# Altium PCB TK104_Pulsbegrenser_Eurorack.PcbDoc
Units mm, origin at the board's own origin, x right, y up, seen from the top; angles counter-clockwise.
Board outline 110 x 50 mm, 2 copper layers (Top Layer, Bottom Layer); 62 components, 48 nets, 216 pads, 292 vias.
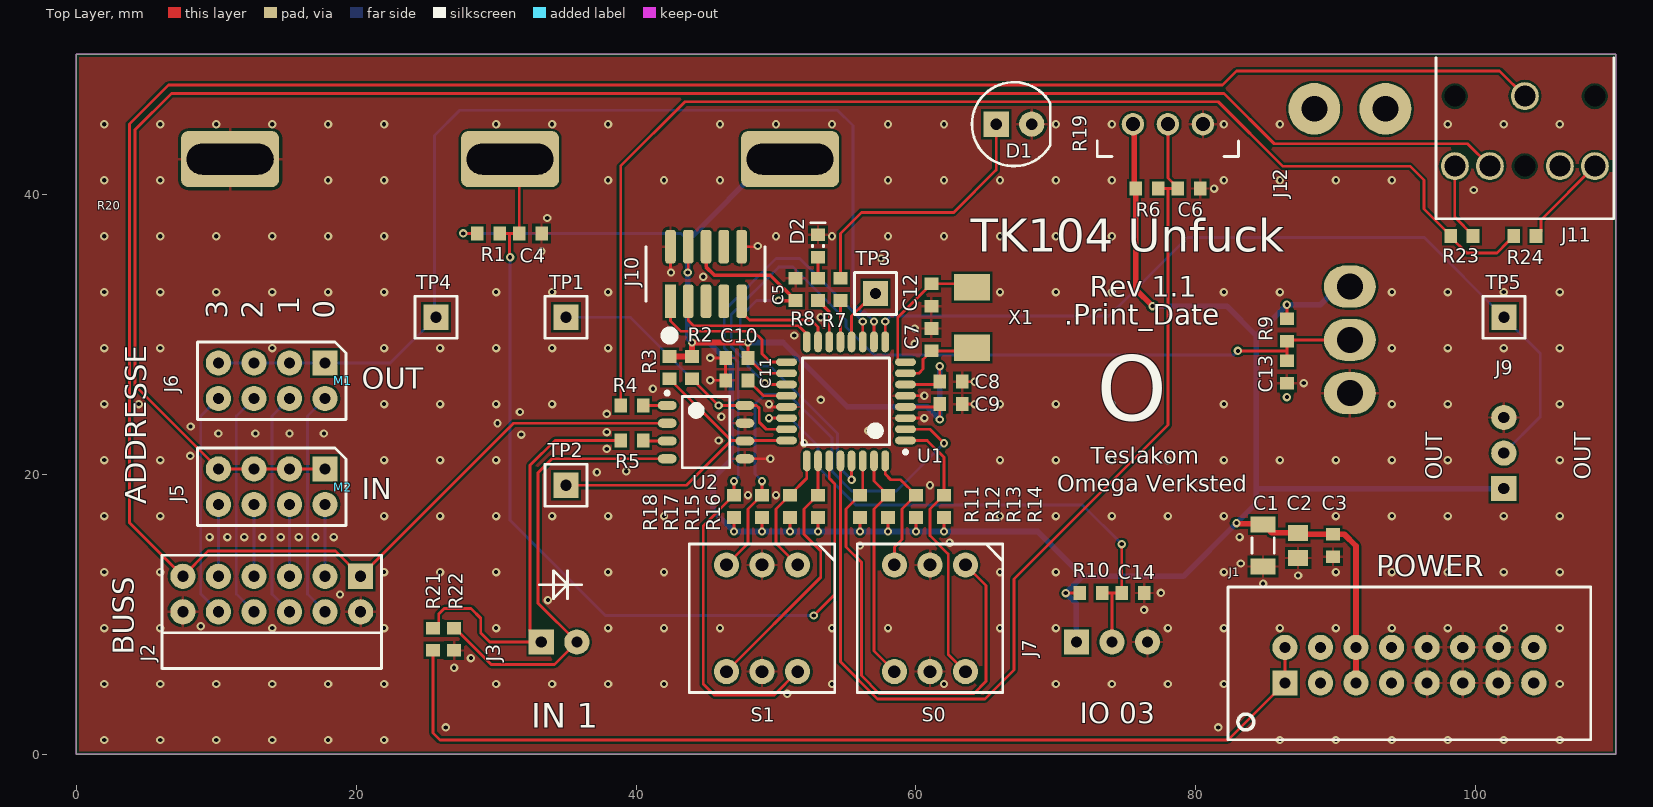
[diagram p0: Top Layer view]
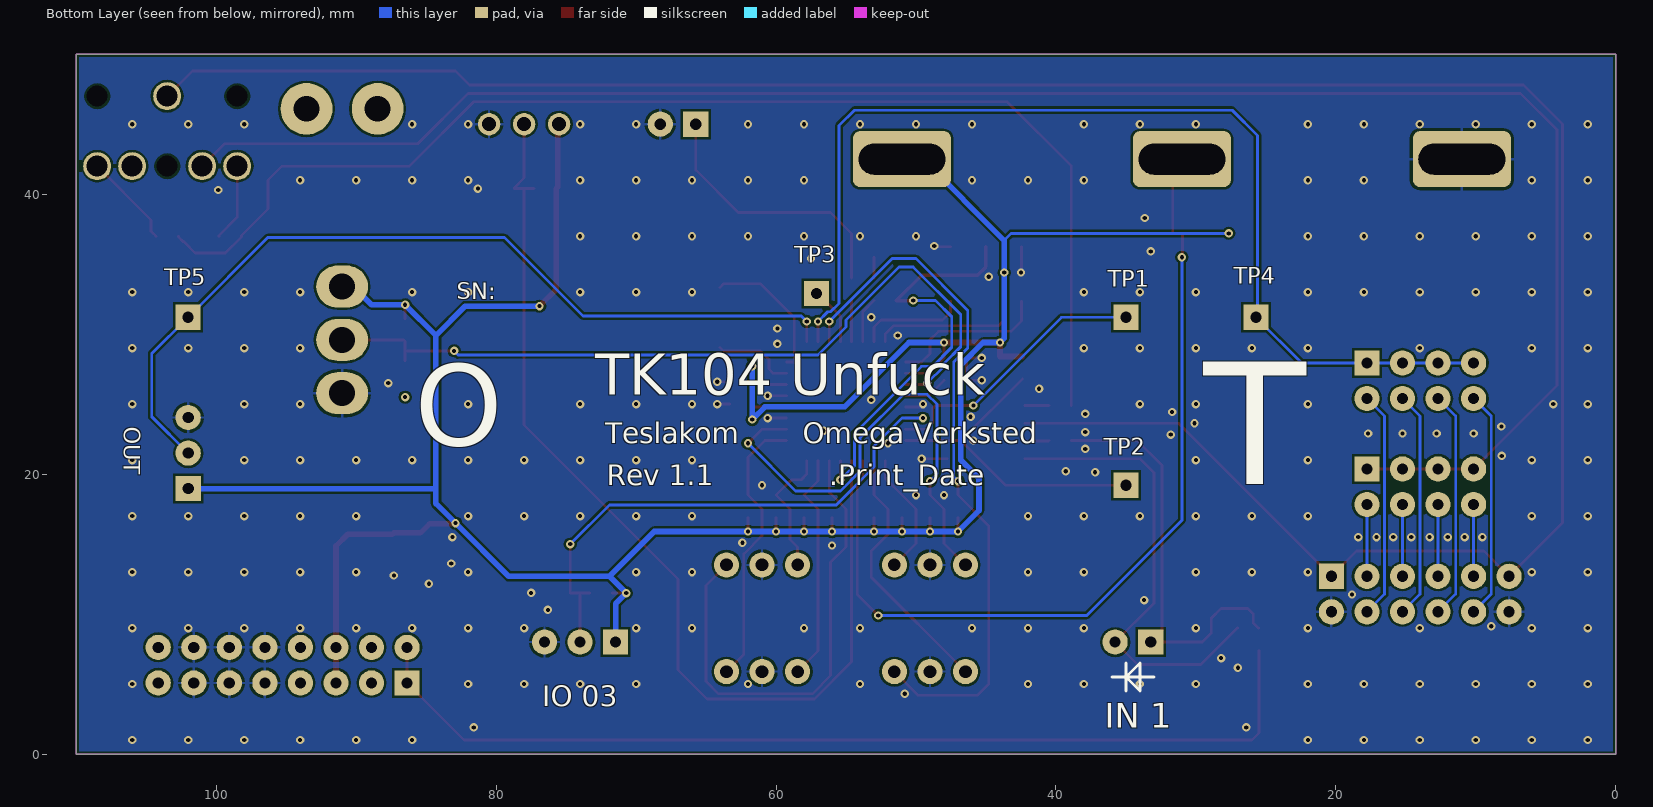
[diagram p1: Bottom Layer view, seen from below]

## Layer stack, top to bottom
Top Solder: solder mask 0.0102, Solder Resist, Dk 3.5
Top Layer: signal copper 0.0356
Dielectric 1: dielectric 0.32, FR-4, Dk 4.8
Bottom Layer: signal copper 0.0356
Bottom Solder: solder mask 0.0102, Solder Resist, Dk 3.5

## Board outline
0,0 0,50 110,50 110,0

## Design rules (kind name [scope] priority, off if disabled: settings)
Clearance [All] p1: gap=0.16 ignorepadtopadclearanceinfootprint=FALSE except(0: Arc-Text Arc-Hole Track-Text Track-Hole SMDPad-Text SMDPad-Hole THPad-Text THPad-Hole Via-Text Via-Hole Fill-Text Fill-Hole Poly-Text Poly-Hole Region-Text Region-Hole Text-Text Text-Hole)
Height [All] p1: minheight=0 maxheight=200 prefheight=12.7
HoleSize [All] p1: absolutevalues=TRUE maxlimit=6.35 minlimit=0.3 maxpercent=80.000 minpercent=20.000
MinimumSolderMaskSliver [All] p1: minsoldermaskwidth=0.1
PlaneClearance [All] p1: clearance=1
PlaneConnect [All] p1: planeconnectstyle=Relief reliefexpansion=0.508 reliefentries=4 reliefconductorwidth=1 reliefairgap=0.254
PolygonConnect PolygonConnect_1 [IsVia] p1: connectstyle=Direct reliefconductorwidth=0.254 reliefentries=4 polygonreliefangle="90 Angle" airgapwidth=0.254
PolygonConnect [All] p2: connectstyle=Relief reliefconductorwidth=0.2 reliefentries=4 polygonreliefangle="90 Angle" airgapwidth=0.2
RoutingVias [All] p1: holewidth=0.3 width=0.6 viastyle="Through Hole" minholewidth=0.3 minwidth=0.6 maxholewidth=6.35 maxwidth=10
SilkToSolderMaskClearance [IsPad] p1: minsilkscreentomaskgap=0.178 clearancetoexposedcopper=TRUE
SolderMaskExpansion [All] p1: expansion=0.1
Width [All] p1: maxlimit=10 minlimit=0.16 preferedwidth=0.4
24 further rules are at their usual default settings.

## Components (designator, comment, footprint, x,y, rotation, side; value= is the part's Value field where it differs from the comment)
C1 "4.7uF" CAPC1206(3216)170_N 84.8,14.9 r90 top
C2 "1uF" CAPC0805(2012)100_N 87.3,14.9 r90 top
C3 "100nF" CAPC0603(1608)55_N 89.8,14.9 r90 top
C4 "100nF" CAPC0603(1608)55_N 32.45,37.2 r180 top
C5 "100nF" CAPC0603(1608)55_N 51.4,33.2 r270 top
C6 "100nF" CAPC0603(1608)55_N 79.5,40.4 r180 top
C7 "8.2pF" CAPC0603(1608)55_N 61.1,29.6 r270 top
C8 "100nF" CAPC0603(1608)55_N 62.5,26.6 r0 top
C9 "100nF" CAPC0603(1608)55_N 62.5,25 r0 top
C10 "100nF" CAPC0603(1608)55_N 47.2,28.3 r0 top
C11 "100nF" CAPC0603(1608)55_N 47.2,26.7 r0 top
C12 "8.2pF" CAPC0603(1608)55_N 61.1,32.8 r90 top
C13 "100nF" CAPC0603(1608)55_N 86.5,27.3 r90 top
C14 "100nF" CAPC0603(1608)55_N 75.5,11.5 r180 top
D1 "LED Gul" LED254W7L870D500 67,45 r0 top
D2 "SMD LED Red" I_LEDC0603(1608)_N 53,36.3 r90 top
J1 "Header2x8" HDRV16W64P254_2X8_Shrouded 95.25,6.35 r90 top
J2 "Header2x6" HDRV12W64P254_2X6_RA 13.97,11.43 r270 top
J3 "JST 2pin" JST_2P 34.5,8 r270 top
J5 "Header2x4" HDRV8W64P254_2X4 13.97,19.1 r270 top
J6 "Header2x4" HDRV8W64P254_2X4 13.97,26.67 r270 top
J7 "JST 3pin" JST_3P 74,8 r270 top
J9 "JST 3pin" JST_3P 102,21.5 r0 top
J10 "Header SMD 127 2x5" SMDHDRV10P127_2X5_615X330X560B 45,34.3 r90 top
J11 "3.5mm jack" PJ-306M 103.5,47 r0 top
J12 "Slide switch" 1MS1T2B4M7RE 91,33.4 r180 top
M1 "Jumper 100mil" SNT-100-BK-T 19.05,26.67 r90 top
M2 "Jumper 100mil" SNT-100-BK-T 19.05,19.05 r90 top
R1 "10k" RESC0603(1608)_N 29.45,37.2 r180 top
R2 "4k7" RESC0603(1608)_N 44,27.6 r90 top
R3 "4k7" RESC0603(1608)_N 42.4,27.6 r90 top
R4 "330R" RESC0603(1608)_N 39.7,24.9 r0 top
R5 "330R" RESC0603(1608)_N 39.7,22.4 r0 top
R6 "10k" RESC0603(1608)_N 76.5,40.4 r180 top
R7 "330R" RESC0603(1608)_N 54.6,33.2 r270 top
R8 "330R" RESC0603(1608)_N 53,33.2 r270 top
R9 "10k" RESC0603(1608)_N 86.5,30.3 r90 top
R10 "10k" RESC0603(1608)_N 72.5,11.5 r180 top
R11 "10k" RESC0603(1608)_N 56,17.7 r270 top
R12 "10k" RESC0603(1608)_N 58,17.7 r270 top
R13 "10k" RESC0603(1608)_N 60,17.7 r270 top
R14 "10k" RESC0603(1608)_N 62,17.7 r270 top
R15 "10k" RESC0603(1608)_N 51,17.7 r270 top
R16 "10k" RESC0603(1608)_N 53,17.7 r270 top
R17 "10k" RESC0603(1608)_N 49,17.7 r270 top
R18 "10k" RESC0603(1608)_N 47,17.7 r270 top
R19 "RK09711110K" RK09711110K 78,45 r90 top
R20 "=navn" PTA4543-ANGLE 31,42.5 r270 top
R21 "0R" RESC0603(1608)_N 25.5,8.2 r90 top
R22 "0R" RESC0603(1608)_N 27,8.2 r90 top
R23 "0R" RESC0603(1608)_N 99,37 r0 top
R24 "0R" RESC0603(1608)_N 103.5,37 r0 top
S0 "MCRS3AF-16R-V-B" MCRS3AF-16R-V-B 61,9.7 r180 top
S1 "MCRS3AF-16R-V-B" MCRS3AF-16R-V-B 49,9.7 r180 top
TP1 "Header1x1" HDRV1W64P254_1X1_254X254X900B 35,31.2 r0 top
TP2 "Header1x1" HDRV1W64P254_1X1_254X254X900B 35,19.2 r0 top
TP3 "Header1x1" HDRV1W64P254_1X1_254X254X900B 57.1,32.9 r0 top
TP4 "Header1x1" HDRV1W64P254_1X1_254X254X900B 25.7,31.2 r0 top
TP5 "Header1x1" HDRV1W64P254_1X1_254X254X900B 102.013,31.2 r0 top
U1 "ATMEGA168V-10AI" TQFP80P900X900X120-32N 55,25.2 r180 top
U2 "Dual_Optocoupler" SOIC127P590X363-8N 45,23 r0 top
X1 "NX5032GA-16" CRYSTAL-ABM7 64,31.2 r90 top

## Footprints (in the part's own frame and the unit in brackets; to place one, negate y for a bottom-side part, rotate by r counter-clockwise, add the part's x,y. Pads: shape width x height; smd on the part's side, far side on the other; paste and mask are expansions set on the pad)
1MS1T2B4M7RE [mm]
  round 3.7 hole 1.85: 0(-2.54,-12.7) 0(2.54,-12.7)
  oval 3.7x3 hole 1.85: 1(0,0) 2(0,3.81) 3(0,7.62)
  body extent -3.36,-26.99 3.4,7.99, height 12.85
CAPC0603(1608)55_N [mm] "Chip Capacitor, Body 1.6x0.8mm, Height 0.55mm, IPC Medium Density"
  rect 0.9x1 smd: 1(-0.8,0) 2(0.8,0)
  body extent -0.87,-0.48 0.88,0.47, height 0.55
CAPC0805(2012)100_N [mm] "Chip Capacitor, Body 2.0x1.2mm, Height 1.0mm, IPC Medium Density"
  rect 1.15x1.45 smd: 1(-0.9,0) 2(0.9,0)
  body extent -1.1,-0.72 1.1,0.73, height 1
CAPC1206(3216)170_N [mm] "Chip Capacitor, Body 3.2x1.6mm, Height 1.7mm, IPC Medium Density"
  rect 1.15x1.8 smd: 1(-1.5,0) 2(1.5,0)
  silkscreen extent -0.55,-0.8 0.55,0.8, body extent -1.7,-0.9 1.7,0.9, height 1.7
CRYSTAL-ABM7 [mm]
  rect 1.9x2.6 smd: 1(-2.159,0) 2(2.141,0)
  body extent -3.05,-1.75 3.05,1.75, height 1.44
HDRV1W64P254_1X1_254X254X900B [mm] "Header 1x1"
  rect 1.8x1.8 hole 0.8: 1(0,0)
  silkscreen extent -1.5,-1.5 1.5,1.5
HDRV8W64P254_2X4 [mm] "Header 2x4"
  rect 1.8x1.8 hole 0.8: 1(-1.27,3.81)
  round 1.8 hole 0.8: 2(1.27,3.81) 3(-1.27,1.27) 4(1.27,1.27) 5(-1.27,-1.27) 6(1.27,-1.27) 7(-1.27,-3.81) 8(1.27,-3.81)
  silkscreen extent -2.77,-5.31 2.77,5.31, body extent -2.54,-5.08 2.54,5.08, height 8.38
HDRV12W64P254_2X6_RA [mm] "Header 2x6 Right angle"
  rect 1.8x1.8 hole 0.8: 1(-1.27,6.35)
  round 1.8 hole 0.8: 2(1.27,6.35) 3(-1.27,3.81) 4(1.27,3.81) 5(-1.27,1.27) 6(1.27,1.27) 7(-1.27,-1.27) 8(1.27,-1.27) 9(-1.27,-3.81) 10(1.27,-3.81) 11(-1.27,-6.35) 12(1.27,-6.35)
  silkscreen extent -2.77,-7.85 5.31,7.85, body extent -1.61,-7.62 11.15,7.62, height 5.59
HDRV16W64P254_2X8_Shrouded [mm] "Header 2x8 Shrouded"
  rect 1.8x1.8 hole 0.8: 1(-1.27,8.89)
  round 1.8 hole 0.8: 2(1.27,8.89) 3(-1.27,6.35) 4(1.27,6.35) 5(-1.27,3.81) 6(1.27,3.81) 7(-1.27,1.27) 8(1.27,1.27) 9(-1.27,-1.27) 10(1.27,-1.27) 11(-1.27,-3.81) 12(1.27,-3.81) 13(-1.27,-6.35) 14(1.27,-6.35) 15(-1.27,-8.89) 16(1.27,-8.89)
  silkscreen extent -5.33,-12.95 5.59,12.95, body extent -4.44,-12.07 4.83,12.06, height 8.89
I_LEDC0603(1608)_N [mm] "Chip Resistor, Body 1.6x0.8mm, IPC Medium Density"
  rect 0.9x1 smd: 1(-0.8,0) 2(0.8,0)
  silkscreen extent -0.05,-0.51 1.65,0.51, body extent -0.85,-0.45 0.85,0.45, height 0.9
JST_2P [mm]
  rect 1.8x1.8 hole 0.8: 1(0,-1.27)
  round 1.8 hole 0.8: 2(0,1.27)
  body extent -2.4,-3.7 3.35,3.7, height 7
JST_3P [mm]
  rect 1.8x1.8 hole 0.8: 1(0,-2.54)
  round 1.8 hole 0.8: 2(0,0) 3(0,2.54)
  body extent -2.35,-4.95 3.4,4.95, height 7
LED254W7L870D500 [mm] "5mm LED, 8.7mm høy, 2.54mm pitch"
  rect 1.8x1.8 hole 0.8: 1(-1.27,0)
  round 1.8 hole 0.8: 2(1.27,0)
  silkscreen extent -3,-3 2.6,3, body extent -3,-3 2.5,3, height 8.9
MCRS3AF-16R-V-B [mm] "Rotary hex encoder"
  round 1.8 hole 0.9: 1(-2.54,-3.81) 2(2.54,3.81) 4(2.54,-3.81) 8(-2.54,3.81) C(0,3.81) C(0,-3.81)
  silkscreen extent -5.2,-5.3 5.2,5.3, body extent -5,-5 5,5, height 5.01
PJ-306M [mm] "3.5mm Stereo jack"
  round 2 hole 1.5: 1(0,0) 2(5,-5) 3(2.5,-5) 4(-2.5,-5) 5(-5,-5)
  round 0 hole 1.5 unplated: ""(-5,0) ""(0,-5) ""(5,0)
  silkscreen extent -6.35,-8.75 6.35,2.75, body extent -6.1,-8.5 6.1,6.5, height 11
PTA4543-ANGLE [mm]
  rrect25% 4x7 hole 2.2 slot 6.2 at 90 deg: 1(0,20) 2(0,0) 3(0,-20)
  body extent -22.5,-31 2.5,31, height 12.6
RESC0603(1608)_N [mm] "Chip Resistor, Body 1.6x0.8mm, IPC Medium Density"
  rect 0.9x1 smd: 1(-0.8,0) 2(0.8,0)
  body extent -0.85,-0.47 0.85,0.47, height 0.6
RK09711110K [mm] "Single gang linear potmeter"
  round 1.6 hole 1: 1(0,-2.5) 2(0,0) 3(0,2.5)
  silkscreen extent -2.3,-5.05 -1.2,5.05, body extent -2.02,-4.7 25.02,4.8, height 11.35
SMDHDRV10P127_2X5_615X330X560B [mm] "SMD 2X5 Vertical Header"
  rect 2.4x0.76 smd: 1(-1.95,2.54)
  rrect50% 2.4x0.76 smd: 2(1.95,2.54) 3(-1.95,1.27) 4(1.95,1.27) 5(-1.95,0) 6(1.95,0) 7(-1.95,-1.27) 8(1.95,-1.27) 9(-1.95,-2.54) 10(1.95,-2.54)
  silkscreen extent -4.54,-4.21 1.95,4.29, body extent -2.7,-3.18 2.8,3.17, height 4.5
SNT-100-BK-T [mm] "Jumper"
  body extent -2.54,0 2.54,2.54, height 8.64
SOIC127P590X363-8N [mm] "SOIC, 8-Leads, Body 4,88x3,91mm, Pitch 1,27mm, IPC Medium Density"
  oval 1.35x0.65 smd: 1(-2.775,1.905) 2(-2.775,0.635) 3(-2.775,-0.635) 4(-2.775,-1.905) 5(2.775,-1.905) 6(2.775,-0.635) 7(2.775,0.635) 8(2.775,1.905)
  silkscreen extent -2.9,-2.55 1.7,2.9, body extent -3.1,-2.5 3.1,2.5, height 1.75
TQFP80P900X900X120-32N [mm] "TQFP, 32-Leads, Body 7,00x7,00mm, Pitch 0,80mm, IPC Medium Density"
  oval 1.5x0.55 smd mask+0.13: 1(-4.25,2.8) 2(-4.25,2) 3(-4.25,1.2) 4(-4.25,0.4) 5(-4.25,-0.4) 6(-4.25,-1.2) 7(-4.25,-2) 8(-4.25,-2.8) 17(4.25,-2.8) 18(4.25,-2) 19(4.25,-1.2) 20(4.25,-0.4) 21(4.25,0.4) 22(4.25,1.2) 23(4.25,2) 24(4.25,2.8)
  oval 0.55x1.5 smd mask+0.13: 9(-2.8,-4.25) 10(-2,-4.25) 11(-1.2,-4.25) 12(-0.4,-4.25) 13(0.4,-4.25) 14(1.2,-4.25) 15(2,-4.25) 16(2.8,-4.25) 25(2.8,4.25) 26(2,4.25) 27(1.2,4.25) 28(0.4,4.25) 29(-0.4,4.25) 30(-1.2,4.25) 31(-2,4.25) 32(-2.8,4.25)
  silkscreen extent -4.38,-3.1 3.1,3.75, body extent -4.51,-4.51 4.51,4.51, height 1.1

## Part data
C1: library part 2992, "X7R 50V", id=2992, navn=4.7uF, nokkelord="Kondensator, capacitor", pakke_opprettet="11.02.2015 13.21.22", pakke_opprettet_av=815, pakketype=1206, pris=1, produsent=Multikomp, symbol_opprettet="14.11.2014 20.19.34", symbol_opprettet_av=815
C2: library part 3582, "X7R 50V 10%", id=3582, leverandor=Farnell, leverandor_varenr=1735541, navn=1uF, nokkelord="Kondensator, capacitor", pakke_opprettet="14.11.2014 20.52.01", pakke_opprettet_av=815, pakketype=0805, pris=4, produsent=Murata, symbol_opprettet="14.11.2014 20.19.34", symbol_opprettet_av=815
C3 C4 C5 C6 C8 C9 C10 C11 C13 C14: library part 3028, "X7R 50V 5%", id=3028, leverandor=Farnell, leverandor_varenr=1759122, navn=100nF, nokkelord="Kondensator, Capacitor, CAP", pakke_opprettet_av=815, pakketype=0603, pris=1, produsent=Multikomp, symbol_opprettet_av=815
  C3 C4 C6 C13 C14: pakke_opprettet="18.02.2015 14.18.13", symbol_opprettet="14.11.2014 20.19.34"
  C5 C8 C9 C10 C11: pakke_opprettet="18.02.2015 14:18:13", symbol_opprettet="14.11.2014 20:19:34"
C7 C12: library part 3032, "NP0 50V 5%", id=3032, leverandor=Farnell, leverandor_varenr=2434642, navn=8.2pF, nokkelord="Kondensator, Capacitor, CAP", pakke_opprettet="18.02.2015 14:18:13", pakke_opprettet_av=815, pakketype=0603, pris=1, produsent=Murata, symbol_opprettet="14.11.2014 20:19:34", symbol_opprettet_av=815
D1: library part 4054, antall=500, beskrivelse="Farget/diffuse LED, 5mm", dybde=4, hylle=0, id=4054, kolonne=0, lager_type=Baklager, navn="LED Gul", nokkelord="LED, gul, yellow, 5mm, diode, lys, light,  led 5mm", pakke_opprettet="2016-02-09 18:21:00", pakke_opprettet_av=1366, pakketype=-, pris=1, produsent=-, rad=4, rom=GM, symbol_opprettet="2014-07-06 18:59:47", symbol_opprettet_av=815
D2: library part 2209, antall=50, beskrivelse=SMD, dybde=2, hylle=13, id=2209, kolonne=0, lager_type=Fremlager, leverandor=Farnell, leverandor_varenr=8554641, navn="SMD LED Red", nokkelord=SMD, pakke_opprettet="06.07.2014 18.55.44", pakke_opprettet_av=815, pakketype=0603, pris=1, produsent=Avago, rad=0, rom=OV, symbol_opprettet="06.07.2014 18.59.47", symbol_opprettet_av=815
J1: library part 4645, beskrivelse=Header, id=4645, navn="Header Shrouded 2X8P", nokkelord=Header, pakke_opprettet="2019-02-14 23:39:48", pakke_opprettet_av=815, pakketype=TH, pris=10, symbol_opprettet="2014-11-13 11:08:32", symbol_opprettet_av=815
J2: library part 4651, beskrivelse=Header, id=4651, navn="Header 2X6 Right Angle", nokkelord=Header, pakke_opprettet="2019-02-16 14:15:04", pakke_opprettet_av=815, pakketype=TH, pris=6, symbol_opprettet="2014-11-13 11:04:02", symbol_opprettet_av=815
J3: library part 2227, "pris pr. stk.", id=2227, navn="JST 2pin", nokkelord="Connector, Kontakt", pakke_opprettet="28.06.2014 18:25:03", pakke_opprettet_av=815, pakketype=TH, pris=2, symbol_opprettet="28.06.2014 15:33:17", symbol_opprettet_av=815
J5 J6: library part 4648, beskrivelse=Header, id=4648, navn="Header 2X4", nokkelord=Header, pakke_opprettet="2019-02-16 12:01:43", pakke_opprettet_av=815, pakketype=TH, pris=4, symbol_opprettet="2014-11-13 11:03:49", symbol_opprettet_av=815
J7 J9: library part 2226, "pris pr. stk.", id=2226, navn="JST 3pin", nokkelord="Connector, Kontakt", pakke_opprettet="28.06.2014 18:25:12", pakke_opprettet_av=815, pakketype=TH, pris=2, symbol_opprettet="28.06.2014 15:33:24", symbol_opprettet_av=815
J10: library part 2449, "1,27mm Pitch SMD Header", id=2449, navn="Header SMD 127 2x5", nokkelord=JTAG, pakke_opprettet="15.11.2014 18:30:38", pakke_opprettet_av=815, pakketype=SMD, pris=20, symbol_opprettet="15.11.2014 18:33:29", symbol_opprettet_av=815
J11: library part 3885, "5-pin 3.5mm 1/8\" Stereo Jack PCB Panel Mount", antall=100, beskrivelse="PCB panel mount", dybde=6, hylle=0, id=3885, kolonne=0, lager_type=Baklager, navn="3.5mm jack", pakke_opprettet="2016-11-16 18:13:13", pakke_opprettet_av=1335, pakketype=TH, pris=5, rad=0, rom=GM, symbol_opprettet="2016-11-16 18:31:54", symbol_opprettet_av=1335
J12: library part 4622, "Toggle Switch SPDT On-On", id=4622, leverandor=Farnell, leverandor_varenr=9473297, navn=1MS1T2B4M7RE, nokkelord="1M Series", pakke_opprettet="2019-02-12 23:53:13", pakke_opprettet_av=815, pakketype=TH, pris=36, produsent=Multicomp, symbol_opprettet="2017-02-20 18:08:19", symbol_opprettet_av=1335
M1 M2: library part 4649, beskrivelse="Jumper for 2.54mm pitch header", id=4649, LIBREFERENCE=Jumper, navn="Jumper 100mil", nokkelord="jumper, lask", pakke_opprettet="2019-02-16 12:16:49", pakke_opprettet_av=815, pakketype=-, pris=1, symbol_opprettet="2019-02-16 13:11:13", symbol_opprettet_av=815
R1 R6 R9 R10 R11 R12 R13 R14 R15 R16 R17 R18: library part 2444, "0.1W 1% Thick film resistor", antall=100, dybde=72, hylle=6, id=2444, kolonne=0, lager_type=Fremlager, leverandor=Farnell, leverandor_varenr=2447230, navn=10k, nokkelord="Resistor Motstand", pakke_opprettet="08.07.2014 21.15.30", pakke_opprettet_av=815, pakketype=0603, pris=0, produsent=Multikomp, rad=-1, rom=OV, symbol_opprettet="08.07.2014 21.16.33", symbol_opprettet_av=815
R2 R3: library part 3457, "0.1W 1% Thick film resistor", antall=100, dybde=64, hylle=2, id=3457, kolonne=0, lager_type=Fremlager, navn=4k7, pakke_opprettet="2014-07-08 21:15:30", pakke_opprettet_av=815, pakketype=0603, pris=0, rad=-1, rom=OV, symbol_opprettet="2014-07-08 21:16:33", symbol_opprettet_av=815
R4 R5 R7 R8: library part 2448, "0.1W 1% Thick film resistor", antall=100, dybde=36, hylle=6, id=2448, kolonne=0, lager_type=Fremlager, navn=330R, nokkelord="Resistor Motstand", pakke_opprettet="08.07.2014 21.15.30", pakke_opprettet_av=815, pakketype=0603, pris=0, rad=-1, rom=OV, symbol_opprettet="08.07.2014 21.16.33", symbol_opprettet_av=815
R19: library part 4652, "10k linear pot 1 turn", id=4652, leverandor=Farnell, leverandor_varenr=1191710, navn=RK09711110K, nokkelord="potmeter, pot", pakke_opprettet="2019-02-16 15:55:44", pakke_opprettet_av=815, pakketype=TH, pris=45, produsent=Alps, symbol_opprettet="2016-11-03 15:34:07", symbol_opprettet_av=815
R20: library part Potmeter, Farnell=1688415
R21 R22 R23 R24: library part 3186, "0.1W 1% Thick film resistor", id=3186, navn=0R, nokkelord="Resistor Motstand Jumper Lask", pakke_opprettet="2014-07-08 21:15:30", pakke_opprettet_av=815, pakketype=0603, pris=0, produsent=Multikomp, symbol_opprettet="2014-07-08 21:16:33", symbol_opprettet_av=815
S0 S1: library part 3765, "Rotary hex switch", id=3765, leverandor=Farnell, leverandor_varenr=2083018, navn=MCRS3AF-16R-V-B, nokkelord=encoder, pakke_opprettet="16.09.2016 20.12.26", pakke_opprettet_av=815, pakketype=TH, pris=13, produsent=Multikomp, symbol_opprettet="16.09.2016 20.35.40", symbol_opprettet_av=815
TP1 TP2 TP3 TP4 TP5: library part 2428, beskrivelse="2,54mm pitch", id=2428, navn="Header 1x1", pakke_opprettet="13.11.2014 12:30:32", pakke_opprettet_av=815, pakketype=TH, pris=1, symbol_opprettet="13.11.2014 10:58:46", symbol_opprettet_av=815
U1: library part 2242, antall=100, beskrivelse=Mikrokontroller, dybde=2, hylle=1, id=2242, kolonne=3, lager_type=Fremlager, navn=ATMEGA168V-10AI, pakke_opprettet="11.03.2016 13:28:05", pakke_opprettet_av=1335, pakketype=TQFP, pris=0, produsent=Atmel, rad=1, rom=OV, symbol_opprettet="11.03.2016 13:26:28", symbol_opprettet_av=1335
U2: library part 2379, "Dual Optocoupler", id=2379, leverandor=Farnell, leverandor_varenr=1086672, navn=MOCD207R2M, pakke_opprettet="23.08.2014 14:54:32", pakke_opprettet_av=774, pakketype=SOIC, pris=4, produsent=Fairchild, symbol_opprettet="28.06.2014 15:40:47", symbol_opprettet_av=815
X1: library part 1594, "Crystal 16 MHz", antall=42, dybde=1, hylle=2, id=1594, kolonne=3, lager_type=Fremlager, leverandor=DigiKey, leverandor_varenr=644-1135-1-ND, navn=NX5032GA-16, nokkelord="xtal, oscillator", pakke_opprettet="23.08.2014 20:10:40", pakke_opprettet_av=774, pakketype=SMD, pris=5, produsent=NDK, rad=0, rom=OV, symbol_opprettet="23.08.2014 20:23:20", symbol_opprettet_av=774

## Via types
v1: diameter 0.6, hole 0.3, Top Layer to Bottom Layer, tented both sides, 292 vias

## Nets (pads, with @x,y where several pads share a name; then routed paths per layer and width w, separated by ;. In a path a pad name is that pad's centre, name@x,y a point inside that pad or via, vN(x,y) a via of type N, cw(c..) or ccw(c..) an arc to the next point about the centre after c; other vN are vias at no path point)
0: J2.3 J5.2 | length 5.1
  Bottom Layer w0.2: J2.3 J5.2
1: J2.5 J5.4 | length 5.1
  Bottom Layer w0.2: J2.5 J5.4
2: J2.7 J5.6 | length 5.1
  Bottom Layer w0.2: J2.7 J5.6
3: J2.9 J5.8 | length 5.1
  Bottom Layer w0.2: J2.9 J5.8
4: J2.4 J6.2 | length 16.3
  Bottom Layer w0.2: J2.4 16.52,11.42 16.52,24.14 J6.2
5: J2.6 J6.4 | length 16.3
  Bottom Layer w0.2: J2.6 13.98,11.42 13.98,24.14 J6.4
6: J2.8 J6.6 | length 16.3
  Bottom Layer w0.2: J2.8 11.44,11.42 11.44,24.14 J6.6
7: J2.10 J6.8 | length 16.3
  Bottom Layer w0.2: J2.10 8.9,11.42 8.9,24.14 J6.8
AIN0: C4.2 R1.1 R20.2 U1.27 | length 63.8
  Top Layer w0.2: R1.1 30.95,37.2 ; v1@30.95,35.5 30.95,37.2 ; R20.2 31.65,41.85 C4.2 30.95,37.2 ; v1(52.7,9.9) 54.2,11.4 54.2,19.3 53.8,19.7 U1.27
  Bottom Layer w0.2: v1(31,35.5) 31,16.7 37.8,9.9 v1(52.7,9.9)
AIN1: C6.2 R6.1 R19.2 U1.28 | length 74
  Top Layer w0.2: U1.28 54.6,6.6 54.591,6.6 57.251,3.94 64.94,3.94 67,6 67,12.5 78,23.5 78,40.4 ; R6.1 78,40.4 ; R19.2 78,41.15 78.7,40.45 C6.2 78,40.4
AIN2: C13.2 J12.2 R9.1 U1.19 | length 57.6
  Top Layer w0.2: v1(49.2,26.5) 49.3,26.4 U1.19 ; v1(83,28.8) 86.5,28.8 ; C13.2 86.5,28.8 ; J12.2 86.59,29.59 R9.1 86.5,28.8
  Bottom Layer w0.2: v1(49.2,26.5) 48,27.7 48,27.9 46.8,29.1 46.8,31.4 50.2,34.8 51.2,34.8 55,31 55,30.5 57,28.5 82.7,28.5 v1(83,28.8)
AIN3: C14.2 J7.2 R10.1 U1.22 | length 39.5
  Top Layer w0.2: v1(49.5,24) U1.22 ; R10.1 74,11.5 ; J7.2 74,11.5 ; v1(74.7,15) C14.2 74,11.5
  Bottom Layer w0.2: v1(49.5,24) 51,24 53,22 53,20.5 55.7,17.8 71.9,17.8 v1(74.7,15)
Gate: J3.1 R5.1 R21.2 | length 30.5
  Top Layer w0.2: R21.2 25.55,9 25.9,9.35 25.9,10 26.3,10.4 28.2,10.4 28.9,9.7 28.9,8.65 29.55,8 J3.1 32.43,8.8 32.43,20.63 34.2,22.4 R5.1
GND: C1.1 C2.1 C3.1 C4.1 C5.1 C6.1 C7.1 C8.2 C9.2 C10.1 C11.1 C12.1 C13.1 C14.1 D1.2 D2.2 J1.9 J1.10 J1.11 J1.12 J1.13 J1.14 J2.2 J2.12 J7.3 J9.3 J10.2 J10.10 J12.3 R19.1 R20.3 R22.1 S0.C S1.C U1.3 U1.5 U1.21 U2.5 U2.7 | length 14.7
  Top Layer w0.2: J10.2 42.46,34.44 v1(42.5,34.4) ; v1(45.3,26.7) C11.1 C10.1 v1(45.3,28.3) ; J10.10 48.65,36.25 v1(48.7,36.3) ; U2.5 49.595,21.095 v1(49.6,21.1) ; v1(49.5,25) 49.4,25 49.6,24.8 U1.21 ; U1.3 v1(60.6,24) ; U1.5 v1(60.6,25.6) ; C9.2 v1(64.2,25) ; C8.2 v1(64.2,26.6)
  other v1: 2,1 6,1 10,1 14,1 18,1 22,1 86,1 90,1 94,1 98,1 102,1 106,1 26.41,1.9 81.6,1.9 50.8,4.3 2,5 6,5 10,5 14,5 18,5 22,5 30,5 34,5 38,5 42,5 54,5 62,5 70,5 74,5 78,5 82,5 106,5 27,6.167 28.2,6.851 2,9 6,9 14,9 22,9 30,9 38,9 42,9 46,9 54,9 58,9 66,9 70,9 78,9 82,9 86,9 90,9 94,9 98,9 102,9 106,9 8.9,9.127 76.3,10.3 33.7,11 18.849,11.4 77.5,11.51 84.8,12.16 87.3,12.754 2,13 6,13 22,13 26,13 30,13 38,13 42,13 66,13 70,13 82,13 90,13 94,13 98,13 102,13 106,13 83.2,13.61 56,14.9 62.4,15.1 9.53,15.5 10.8,15.5 12,15.5 13.3,15.5 14.611,15.5 15.9,15.5 17.1,15.5 18.4,15.5 83.121,15.499 2,17 6,17 22,17 26,17 30,17 34,17 38,17 42,17 66,17 70,17 74,17 78,17 82,17 90,17 94,17 98,17 102,17 106,17 48,18.5 50,18.5 61,19.2 37.2,20.129 39.3,20.2 2,21 6,21 22,21 26,21 30,21 66,21 70,21 74,21 78,21 82,21 86,21 90,21 94,21 98,21 106,21 8.155,21.3 37.9,21.8 52,22.2 45.9,22.4 31.8,22.822 10.16,22.9 12.8,22.9 15.24,22.9 17.7,22.9 37.9,23 56.6,23.1 8.175,23.4 30.1,23.635 46.1,24.1 37.9,24.3 31.7,24.435 2,25 4.465,25 22,25 26,25 30,25 34,25 66,25 70,25 74,25 82,25 94,25 98,25 106,25 53.2,25.3 41.2,26.1 87.7,26.5 2,29 6,29 14,29 22,29 26,29 30,29 34,29 38,29 94,29 98,29 102,29 106,29 59.9,29.3 51.3,29.9 59.9,30.4 53.2,31.2 2,33 6,33 10,33 14,33 18,33 22,33 30,33 34,33 38,33 66,33 70,33 74,33 82,33 86,33 94,33 98,33 102,33 106,33 44.8,34.1 57.5,35.4 33.23,35.91 2,37 6,37 10,37 14,37 18,37 22,37 50,37 54,37 58,37 62,37 66,37 70,37 74,37 33.65,38.3 99.851,40.3 81.3,40.4 2,41 6,41 18,41 22,41 38,41 42,41 46,41 58,41 62,41 66,41 70,41 74,41 82,41 86,41 90,41 94,41 2,45 6,45 10,45 14,45 18,45 22,45 30,45 34,45 38,45 46,45 50,45 54,45 58,45 62,45 70,45 74,45 82,45 86,45 98,45 102,45 106,45
HEX0_0: R11.1 S0.1 U1.30 | length 35
  Top Layer w0.2: U1.30 56.2,19.7 56.2,18.7 R11.1 55,17.5 55,14.8 56.1,13.7 56.1,5.6 57.4,4.3 64.1,4.3 65,5.2 65,12.05 S0.1
HEX0_1: R12.1 S0.2 U1.31 | length 16.5
  Top Layer w0.2: U1.31 57,19.5 R12.1 57,17.5 57,7.35 S0.2
HEX0_2: R13.1 S0.4 U1.32 | length 9.4
  Top Layer w0.2: U1.32 57.8,20 58.2,19.6 58.9,19.6 R13.1 59,17.5 59,15.34 58.46,14.8 S0.4
HEX0_3: R14.1 S0.8 U1.1 | length 20
  Top Layer w0.2: U1.1 60.8,22.4 62,21.2 R14.1 61,17.5 61,15.6 62.3,14.3 62.3,7.13 S0.8
HEX1_0: R15.1 S1.1 U1.25 | length 9
  Top Layer w0.2: S1.1 50,15.05 50,17.5 R15.1 52.2,19.7 U1.25
HEX1_1: R16.1 S1.2 U1.26 | length 18.8
  Top Layer w0.2: S1.2 53.2,12.63 53.2,14.5 52,15.7 52,17.5 R16.1 U1.26
HEX1_2: R17.1 S1.4 U1.2 | length 35.4
  Top Layer w0.2: S1.4 48,15.05 48,17.5 R17.1 v1(49,19.5) ; U1.2 61,23.2 v1(62,22.2)
  Bottom Layer w0.2: v1(49,19.5) 48.5,20 48.5,25 49.2,25.7 50.9,25.7 54,22.6 54,20.2 55.4,18.8 58.6,18.8 v1(62,22.2)
HEX1_3: R18.1 S1.8 U1.11 | length 50.7
  Top Layer w0.2: v1(47,19.5) R18.1 44.8,16.3 44.8,5 45.6,4.2 49.85,4.2 S1.8 ; U1.11 v1(56.2,30.9)
  Bottom Layer w0.2: v1(47,19.5) 47.3,19.8 47.3,28 46.3,29 46.3,31.7 50,35.4 51.7,35.4 v1(56.2,30.9)
IN0: R2.1 TP1.1 U1.23 U2.8 | length 22.3
  Top Layer w0.2: R2.1 v1@45.895,24.905 ; v1@45.9,24.905 U2.8 48.595,24.905 48.8,24.7 48.8,23.7 49.3,23.2 U1.23
  Bottom Layer w0.2: TP1.1 39.6,31.2 v1(45.9,24.9)
IN1: R3.1 TP2.1 U1.24 U2.6 | length 22.8
  Top Layer w0.2: TP2.1@35.5,19.2 43.6,19.2 46.8,22.4 ; R3.1 46.8,22.4 ; U1.24 46.8,22.4
LED0: R7.2 U1.13 | length 3
  Top Layer w0.2: U1.13 R7.2
LED1: R8.2 U1.14 | length 3.3
  Top Layer w0.2: R8.2 53.8,31.6 U1.14
NetC11_2: C11.2 U1.20 | length 3.2
  Top Layer w0.2: C11.2 49.1,25.6 U1.20
NetD1_1: D1.1 R7.1 | length 19.5
  Top Layer w0.2: R7.1 54.6,37.2 56.1,38.7 62.7,38.7 65.73,41.73 D1.1
NetD2_1: D2.1 R8.1 | length 1.5
  Top Layer w0.2: R8.1 D2.1
NetJ1_1: J1.1 J1.2 R21.1 | length 71.2
  Top Layer w0.2: R21.1 25.5,1.5 26,1 82.28,1 J1.1 J1.2
NetJ2_1: J2.1 J2.11 J11.1 U2.2 | length 176.5
  Top Layer w0.2: U2.2 31.255,23.635 J2.1 18.52,14.5 9.42,14.5 J2.11 3.8,16.52 3.8,45 6.6,47.8 81.9,47.8 82.9,48.8 101.7,48.8 J11.1
NetJ3_2: J3.2 R22.2 U2.4 | length 33.4
  Top Layer w0.2: R22.2 27.05,9 29.65,6.4 34.17,6.4 J3.2 33,10.77 33,20.1 33.995,21.095 U2.4
NetJ5_1: J5.1 J5.3 J5.5 J5.7 J11.4 | length 134.3
  Top Layer w0.2: J5.1 J5.3 J5.5 J5.7 4.2,26.33 4.2,44.6 6.8,47.2 82,47.2 85.6,43.6 99.4,43.6 J11.4
NetJ11_2: J11.2 R24.2 | length 6.7
  Top Layer w0.2: R24.2 104.65,37.35 104.65,38.15 J11.2
NetJ11_5: J11.5 R23.2 | length 5.5
  Top Layer w0.2: J11.5 98.5,38.35 99.8,37.05 R23.2
NetR4_1: R4.1 R23.1 R24.1 | length 89.1
  Top Layer w0.2: R4.1 38.9,42 43.5,46.6 81.6,46.6 86.2,42 95.3,42 96.3,41 96.3,38.95 98.2,37.05 R23.1 98.2,36.95 99.35,35.8 101.5,35.8 102.3,36.6 102.35,36.6 102.7,36.95 R24.1
NetR4_2: R4.2 U2.1 | length 1.7
  Top Layer w0.2: R4.2 40.505,24.905 U2.1
NetR5_2: R5.2 U2.3 | length 1.7
  Top Layer w0.2: R5.2 40.535,22.365 U2.3
OPTIKK_UT: J9.2 TP5.1 U1.9 | length 62.4
  Top Layer w0.2: U1.9 v1(57.8,30.9)
  Bottom Layer w0.2: v1(57.8,30.9) 58.2,31.3 73.8,31.3 79.4,36.9 96.313,36.9 TP5.1 104.6,28.613 104.6,24.1 J9.2
OPTIKK_UT_DEBUG: J6.1 J6.3 J6.5 J6.7 TP4.1 U1.10 | length 77.2
  Top Layer w0.2: U1.10 v1(57,30.9)
  Bottom Layer w0.2: J6.7 J6.5 J6.3 J6.1 22.44,27.94 TP4.1 25.6,31.3 25.6,44.2 27.4,46 54.4,46 55.5,44.9 55.5,32.2 56.1,31.6 56.3,31.6 v1(57,30.9)
PB0_CLKO: TP3.1 U1.12 | length 3.8
  Top Layer w0.2: U1.12 55.4,31.3 56.3,32.2 TP3.1@57,32.2
PB3_MOSI: J10.9 U1.15 | length 7.7
  Top Layer w0.2: J10.9 47.54,31.56 48.1,31 52.5,31 53,30.5 U1.15
PB4_MISO: J10.3 U1.16 | length 10.8
  Top Layer w0.2: J10.3 43.73,30.97 44.1,30.6 51.6,30.6 52.2,30 U1.16
PB4_SCK: J10.1 U1.17 | length 11.5
  Top Layer w0.2: J10.1 42.46,30.94 43.2,30.2 48.4,30.2 49,29.6 49,28.6 49.6,28 U1.17
RESET: C5.2 J10.6 U1.29 | length 30
  Top Layer w0.2: v1(55.4,19.6) U1.29
  Top Layer w0.254: J10.6 45,34.8 45.6,34.2 49.6,34.2 C5.2 v1(50.2,32.4)
  Bottom Layer w0.2: v1(50.2,32.4) 48.6,32.4 47.44,31.24 47.44,29.06 48.8,27.7 49.6,27.7 54.4,22.9 54.4,20.6 v1(55.4,19.6)
VCC_P5V0: C1.2 C2.2 C3.2 C8.1 C9.1 C10.2 J1.5 J1.6 J7.1 J9.1 J10.4 J12.1 R1.2 R2.2 R3.2 R6.2 R9.2 R10.2 R11.2 R12.2 R13.2 R14.2 R15.2 R16.2 R17.2 R18.2 R19.3 R20.1 U1.4 U1.6 U1.18 | length 225.7
  Top Layer w0.2: v1(27.65,37.2) R1.2 ; v1(43.7,34.4) 43.73,34.43 J10.4 ; v1(47,15.9) R18.2 ; v1(48,29.4) C10.2 49.1,27.2 U1.18 ; v1(49,15.9) R17.2 ; v1(51,15.9) R15.2 ; v1(53,15.9) R16.2 ; v1(56,15.9) R11.2 ; v1(58,15.9) R12.2 ; U1.4 61.5,24.8 C9.1 v1(61.7,23.9) ; U1.6 61.5,26.4 C8.1 v1(61.7,27.7) ; v1(60,15.9) R13.2 ; v1(62,15.9) R14.2 ; v1(70.7,11.5) R10.2 ; R9.2 v1(86.5,32.1)
  Top Layer w0.4: R3.2 R2.2 v1(44,29.4) v1(48,29.4) ; R19.3 75.6,44.9 75.6,40.5 R6.2 75.7,33.2 v1(76.9,32) ; v1(82.9,16.5) 82.938,16.462 84.738,16.462 C1.2 85.4,15.8 C2.2 87.4,15.7 C3.2 90.6,15.7 91.44,14.86 J1.6 J1.5
  Bottom Layer w0.2: v1(27.65,37.2) 43.2,37.2 43.7,36.7
  Bottom Layer w0.4: v1(48,29.4) 50.5,29.4 55.1,24.8 60.8,24.8 v1(61.7,23.9) v1(61.7,27.7) ; R20.1 49.5,42.5 43.7,36.7 v1(43.7,34.4) 43.7,29.7 v1(44,29.4) 45.2,29.4 46.8,27.8 46.8,21 45.5,19.7 45.5,17.4 v1(47,15.9) v1(49,15.9) v1(51,15.9) v1(53,15.9) v1(56,15.9) v1(58,15.9) v1(60,15.9) v1(62,15.9) 68.7,15.9 71.9,12.7 ; J7.1 71.46,10.74 v1(70.7,11.5) 71.9,12.7 ; v1(76.9,32) 82.2,32 84.3,29.9 ; J12.1 90.204,33.4 88.904,32.1 v1(86.5,32.1) 84.3,29.9 ; J9.1 84.34,18.96 84.3,19 ; 71.9,12.7 79.1,12.7 v1(82.9,16.5) 84.3,17.9 84.3,19 ; 84.3,19 84.3,29.9
XTAL1: C7.2 U1.7 X1.1 | length 5.9
  Top Layer w0.2: U1.7 60.2,27.2 60.5,27.5 60.5,28.2 C7.2 63.759,28.8 X1.1
XTAL2: C12.2 U1.8 X1.2 | length 10.2
  Top Layer w0.2: U1.8 58.7,28 58.7,31.2 60.6,33.1 C12.2 63.741,33.6 X1.2
pads on no net: J1.3 J1.4 J1.7 J1.8 J1.15 J1.16 J10.5 J10.7 J10.8 J11. J11.3 J12.0
copper on no net:
  other v1: 86.5,25.5

## Polygon pours and split planes (outlines as drawn)
GND on Top Layer "GND" (solid, pour order 0): 0.2,0.2 0.2,49.8 110,49.8 110,0.2
GND on Bottom Layer "GND" (solid, pour order 2): 0.2,0.2 0.2,49.8 110,49.8 110,0.2

## Keep-outs
Keep-Out Layer:
  the board outline again, w0.1

## Silkscreen, mask and mechanical layers (free items; w line width, h text height)
Top Overlay:
  lines w0.1: 34.6,12.1 34.6,12.1
  lines w0.2: 33.1,12.1 36.1,12.1 ; 35.1,11.1 35.1,13.1 ; 35.1,12.1 34.1,11.1 34.1,13.1 35.1,12.1 ; 35.1,12.1 35.1,12.1
  text "TK104 Unfuck" at 63.9,35.1 h4
  text "Rev 1.1" at 72.4,32.156 h2.5
  text "1" at 15.94,31.4 h1.52 r90
  text "3" at 10.8,31.1 h1.52 r90
  text "2" at 13.34,31.1 h1.52 r90
  text "0" at 18.42,31.1 h1.52 r90
  text ".Print_Date" at 70.6,30.156 h2.5
  text "OUT" at 20.4,26.1 h1.52
  text "O" at 72.9,22.3 h8
  text "Teslakom" at 72.5,20.341 h2
  text "OUT" at 98,19.6 h2 r90
  text "OUT" at 108.6,19.6 h2 r90
  text "Omega Verksted" at 70.1,18.341 h2
  text "IN" at 20.4,18.2 h1.52
  text "ADDRESSE" at 5,17.83 h1.52 r90
  text "POWER" at 92.9,12.689 h1.52
  text "BUSS" at 4.1,7.1 h1.52 r90
  text "IO 03" at 71.7,1.7 h2.5
  text "IN 1" at 32.5,1.3 h3
Bottom Overlay:
  lines w0.1: 34.5,5.5 34.5,5.5
  lines w0.2: 33,5.5 36,5.5 ; 35,4.5 35,6.5 ; 35,5.5 34,6.5 34,4.5 35,5.5 ; 35,5.5 35,5.5
  text "TP3" at 58.7,34.7 h2
  text "TP4" at 27.3,33.2 h2
  text "TP5" at 103.713,33.1 h2
  text "TP1" at 36.3,33 h2
  text "SN:" at 82.8,32.1 h2
  text "TK104 Unfuck" at 72.9,24.7 h5
  text "OUT" at 107,23.4 h2 r90
  text "Omega Verksted" at 58.1,21.7 h2.5
  text "Teslakom" at 72.2,21.7 h2.5
  text "TP2" at 36.6,21 h2
  text "O" at 85.8,20.1 h10
  text ".Print_Date" at 56.2,18.7 h2.5
  text "Rev 1.1" at 72.1,18.7 h2.5
  text "T" at 22.1,16.4 h15
  text "IO 03" at 76.7,2.9 h2.5
  text "IN 1" at 36.5,1.3 h3
Mechanical 1:
  the board outline again, w0.1

## Text inside footprints (layer, text, board x,y; h text height)
S0: Mechanical 13 "0" at 60.765,12.088 h0.8; Mechanical 13 "1" at 61.697,11.997 h0.8 r337.5; Mechanical 13 "2" at 62.523,11.555 h0.8 r315; Mechanical 13 "3" at 63.117,10.831 h0.8 r292.5; Mechanical 13 "4" at 63.388,9.935 h0.8 r270; Mechanical 13 "6" at 62.855,8.177 h0.8 r225; Mechanical 13 "7" at 62.131,7.583 h0.8 r202.5; Mechanical 13 "8" at 61.235,7.312 h0.8 r180; Mechanical 13 "5" at 63.297,9.003 h0.8 r247.5; Mechanical 13 "9" at 60.303,7.403 h0.8 r157.5; Mechanical 13 "A" at 59.477,7.845 h0.8 r135; Mechanical 13 "B" at 58.883,8.569 h0.8 r112.5; Mechanical 13 "C" at 58.612,9.465 h0.8 r90; Mechanical 13 "D" at 58.703,10.397 h0.8 r67.5; Mechanical 13 "E" at 59.145,11.223 h0.8 r45; Mechanical 13 "F" at 59.869,11.817 h0.8 r22.5
S1: Mechanical 13 "A" at 47.477,7.845 h0.8 r135; Mechanical 13 "9" at 48.303,7.403 h0.8 r157.5; Mechanical 13 "C" at 46.612,9.465 h0.8 r90; Mechanical 13 "B" at 46.883,8.569 h0.8 r112.5; Mechanical 13 "D" at 46.703,10.397 h0.8 r67.5; Mechanical 13 "E" at 47.145,11.223 h0.8 r45; Mechanical 13 "F" at 47.869,11.817 h0.8 r22.5; Mechanical 13 "8" at 49.235,7.312 h0.8 r180; Mechanical 13 "7" at 50.131,7.583 h0.8 r202.5; Mechanical 13 "6" at 50.855,8.177 h0.8 r225; Mechanical 13 "5" at 51.297,9.003 h0.8 r247.5; Mechanical 13 "0" at 48.765,12.088 h0.8; Mechanical 13 "1" at 49.697,11.997 h0.8 r337.5; Mechanical 13 "2" at 50.523,11.555 h0.8 r315; Mechanical 13 "4" at 51.388,9.935 h0.8 r270; Mechanical 13 "3" at 51.117,10.831 h0.8 r292.5